# Altium PCB DRV8424.PcbDoc
Units mm, origin at the board's own origin, x right, y up, seen from the top; angles counter-clockwise.
Board outline 65 x 40 mm, 4 copper layers (Top Layer, Layer 1, Layer 2, Bottom Layer), stack 1.831 mm thick; 27 components, 26 nets, 109 pads, 66 vias.
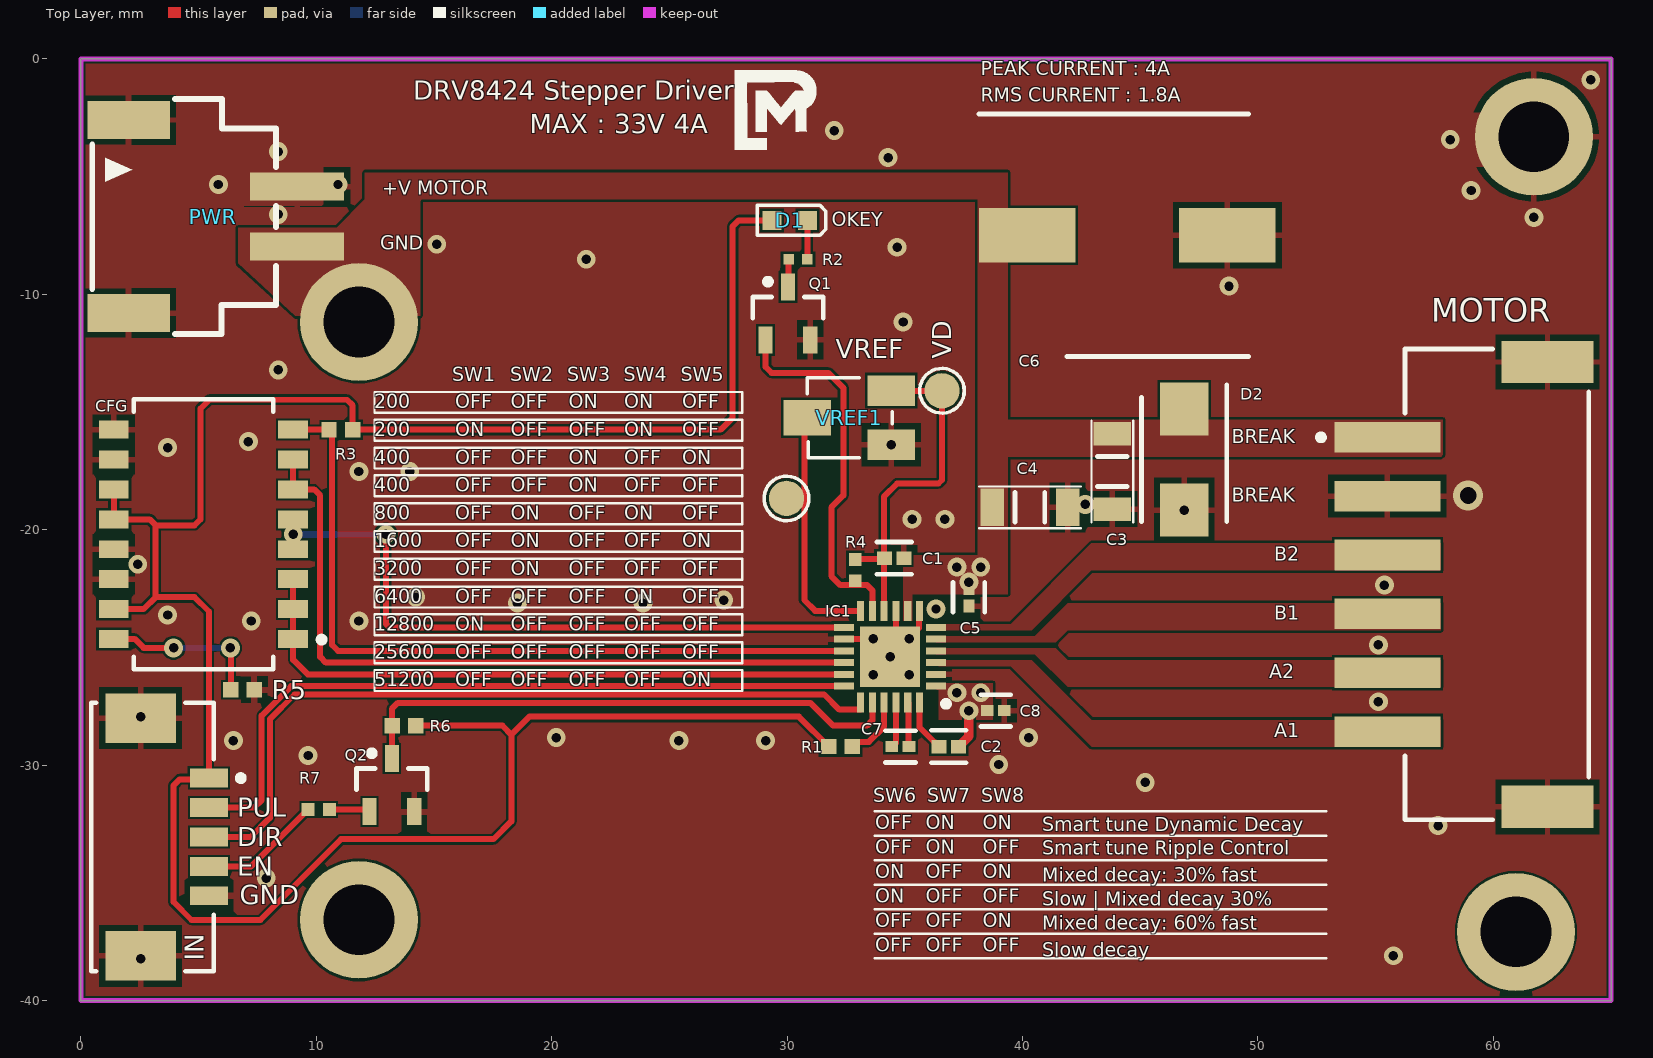
[diagram p0: Top Layer view]
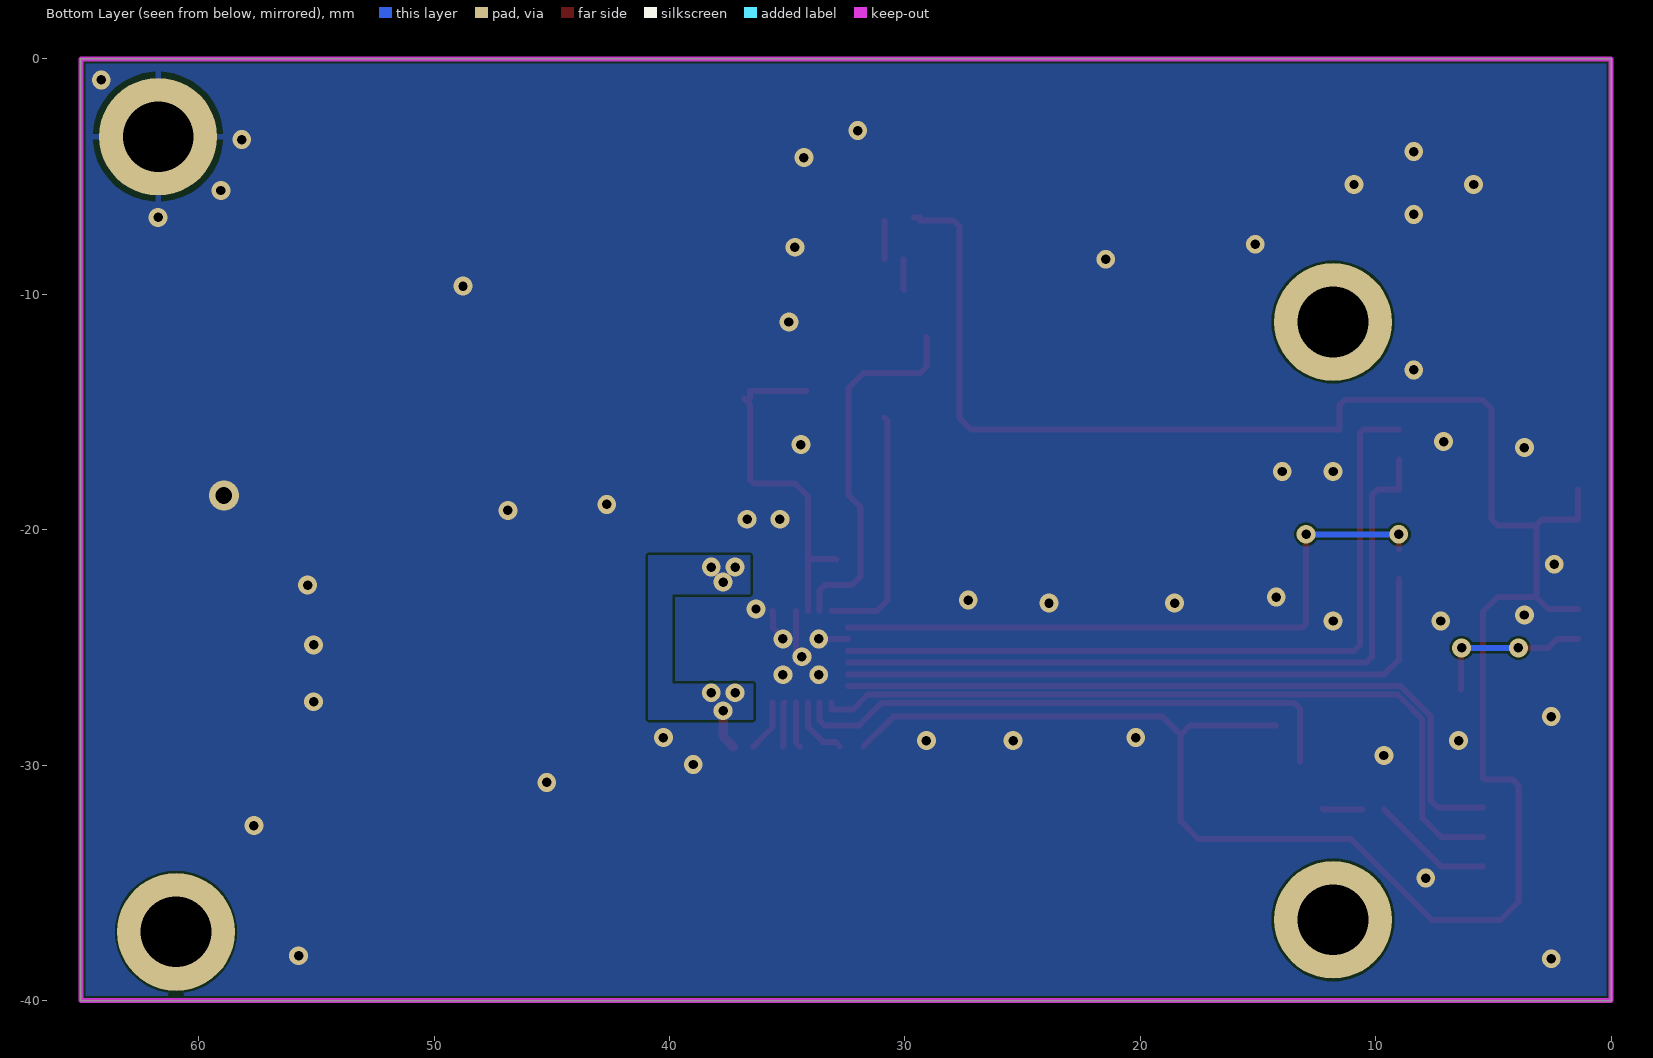
[diagram p1: Bottom Layer view, seen from below]
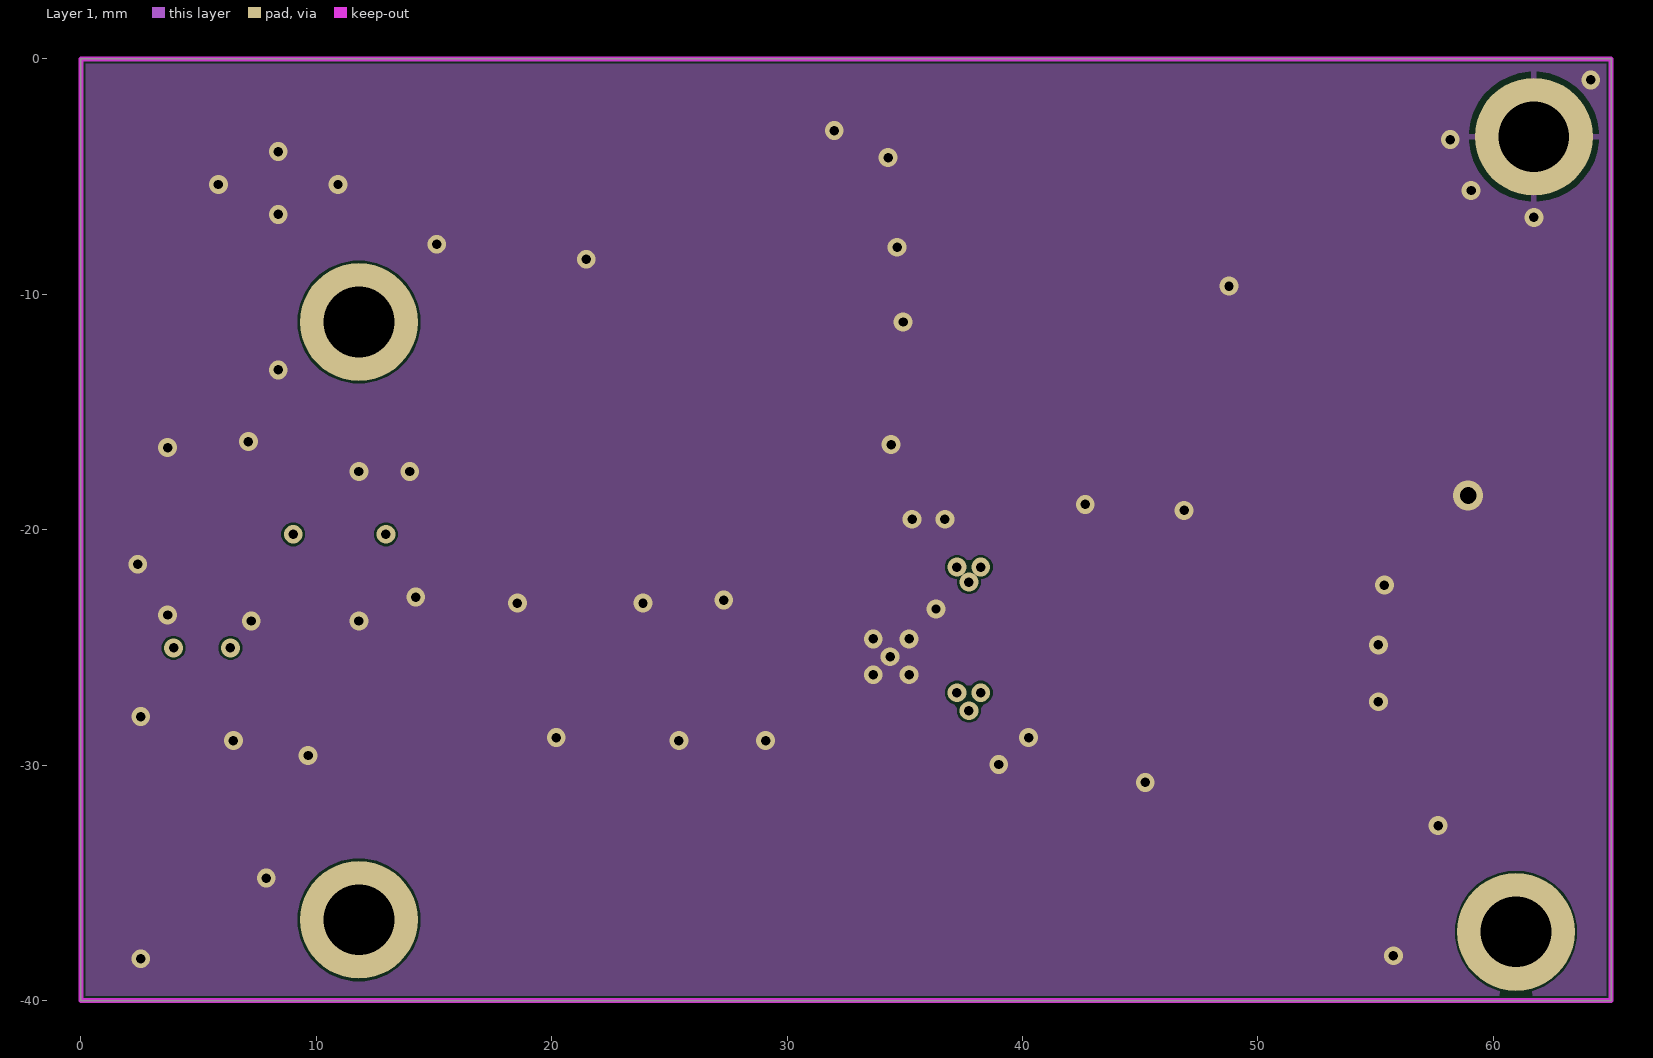
[diagram p2: Layer 1]
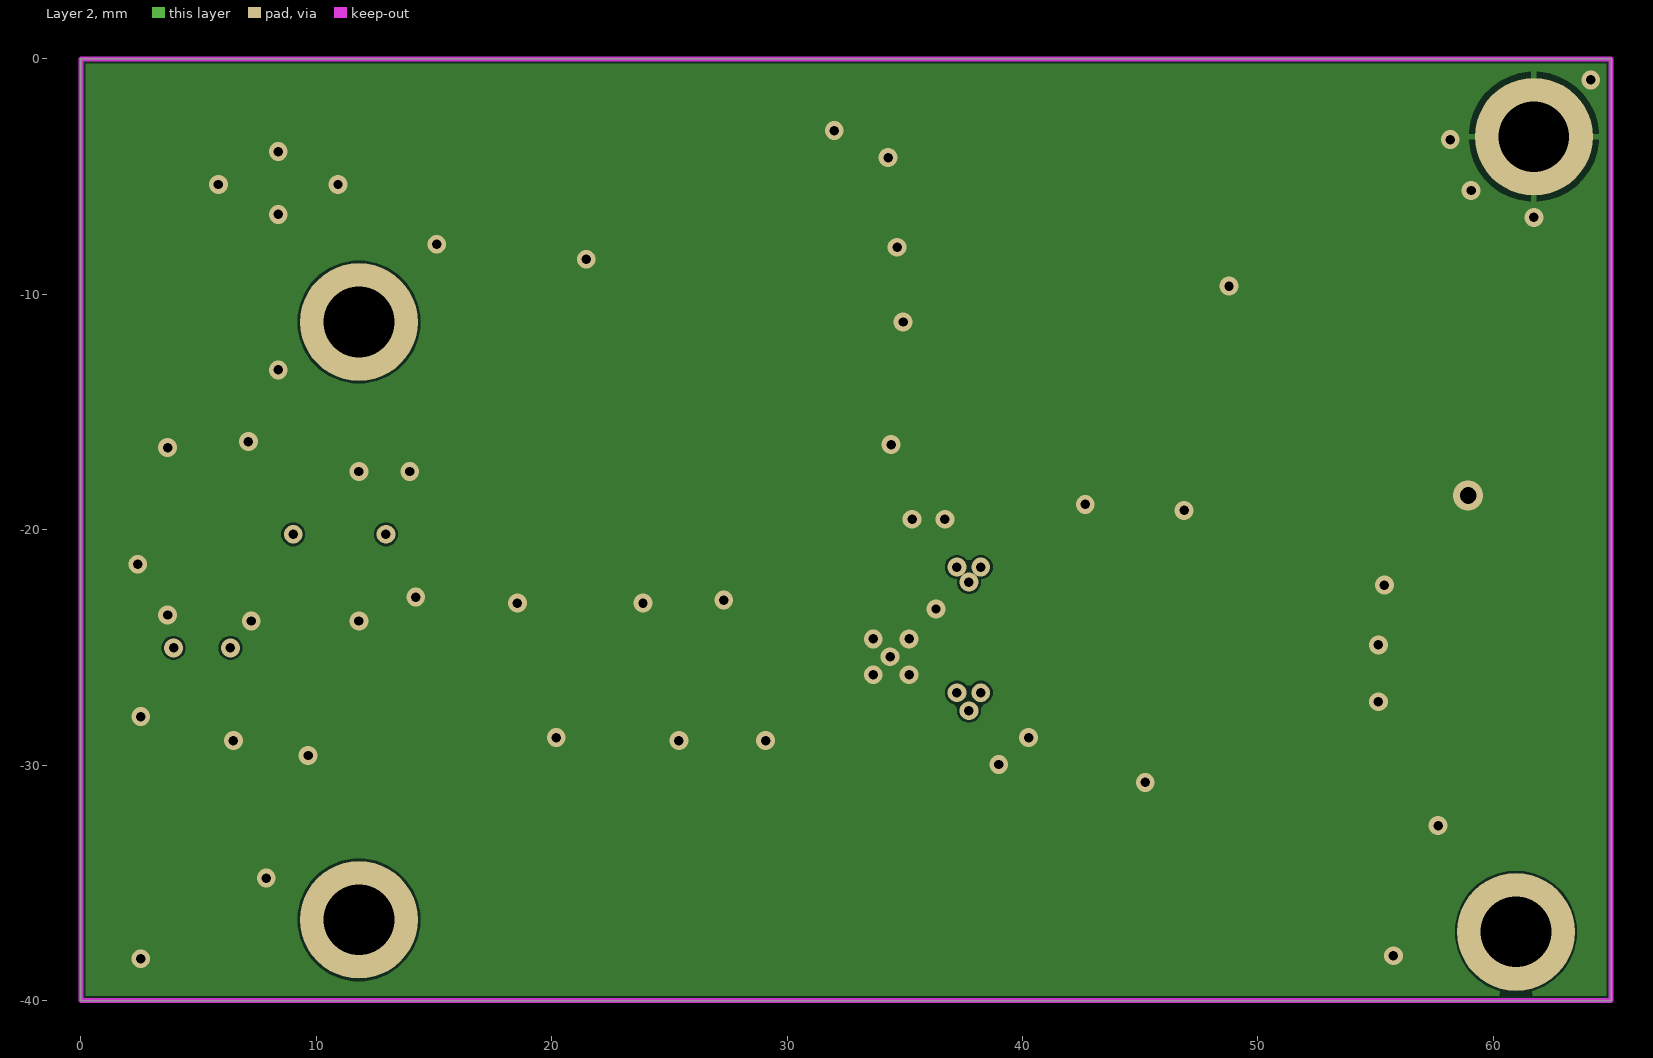
[diagram p3: Layer 2]
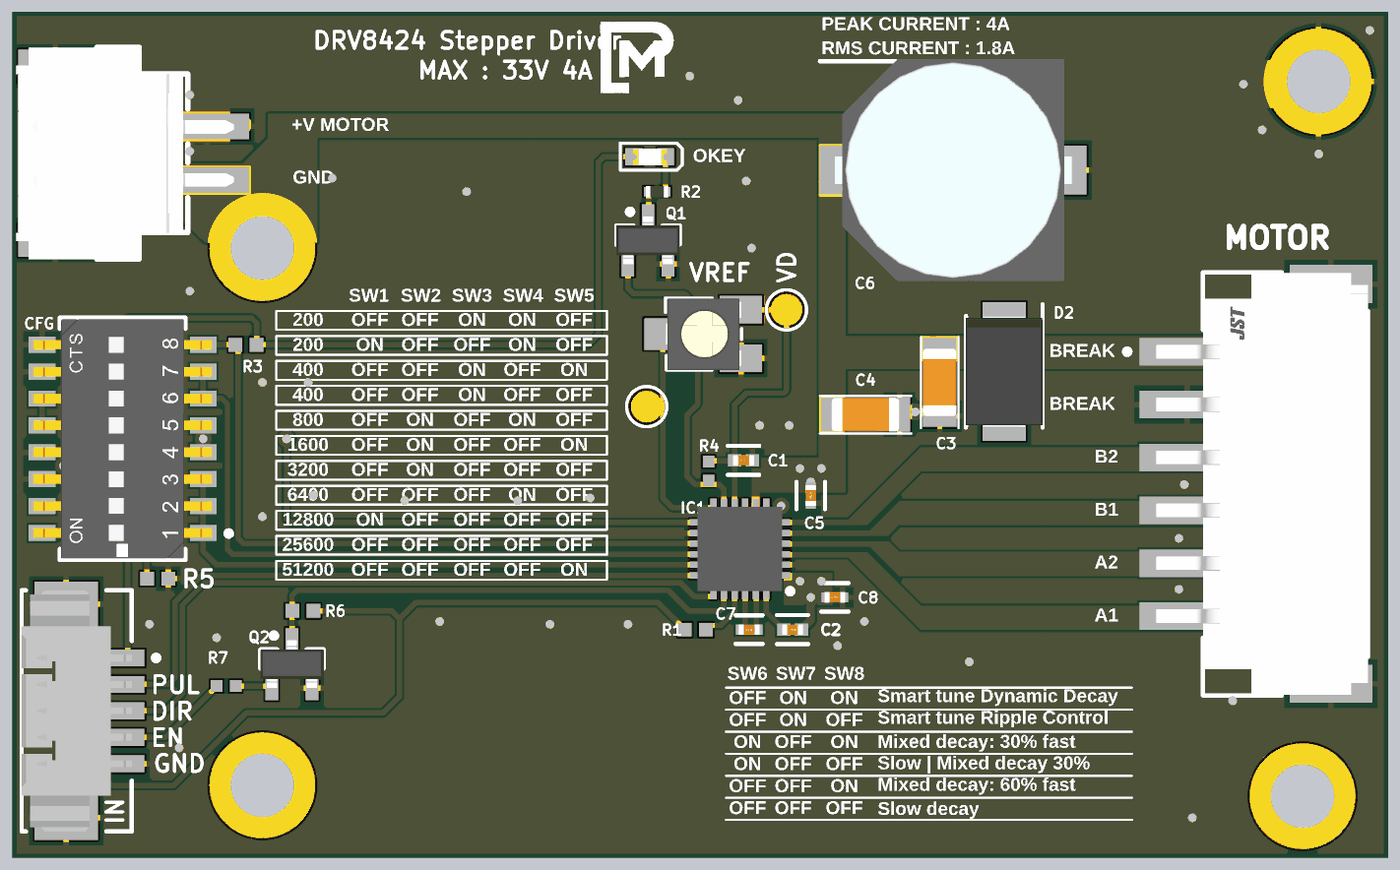
[diagram p4: 3D render of the assembled board from above, using the file's embedded part models]

## Layer stack, top to bottom
Top Solder: solder mask 0.0102, Solder Resist, Dk 3.5
Top Layer: signal copper 0.0356
Dielectric 2: prepreg 0.0711, PP-006, Dk 4.1
Layer 1: signal copper 0.009
Dielectric 1: dielectric 1.6, FR-4, Dk 4.8
Layer 2: signal copper 0.009
Dielectric 3: prepreg 0.0711, PP-006, Dk 4.1
Bottom Layer: signal copper 0.0356
Bottom Solder: solder mask 0.0102, Solder Resist, Dk 3.5

## Board outline
0,-40 0,0 65,0 65,-40

## Design rules (kind name [scope] priority, off if disabled: settings)
Clearance [All] p1: gap=0.1 ignorepadtopadclearanceinfootprint=FALSE
PolygonConnect PolygonConnect_1 [All vs IsNamedPolygon('P_BMA1') Or IsNamedPolygon('P_BMA2') Or IsNamedPolygon('P_BMB1') Or IsNamedPolygon('P_BMB2') Or IsNamedPolygon('P_GND_POWER') Or IsNamedPolygon('P_RES1') Or IsNamedPolygon('P_RES2') Or IsNamedPolygon('P_VM_TOP') Or IsNamedPolygon('P_VM_TOP_1') Or IsNamedPolygon('P_VM_BOTTOM')] p1: connectstyle=Direct reliefconductorwidth=0.254 reliefentries=4 polygonreliefangle="90 Angle" airgapwidth=0.254
PolygonConnect PolygonConnect_3 [(HasFootprint('FP-CRA2512-IPC_A') OR HasFootprint('TSQFP-48'))] p2: connectstyle=Direct reliefconductorwidth=0.254 reliefentries=4 polygonreliefangle="90 Angle" airgapwidth=0.254
PolygonConnect PolygonConnect_2 [isVia] p3: connectstyle=Direct reliefconductorwidth=0.254 reliefentries=4 polygonreliefangle="90 Angle" airgapwidth=0.254
PolygonConnect [All] p4: connectstyle=Relief reliefconductorwidth=0.254 reliefentries=4 polygonreliefangle="90 Angle" airgapwidth=0.254
RoutingVias [All] p1: holewidth=0.5 width=1 viastyle="Through Hole" minholewidth=0.4 minwidth=0.8 maxholewidth=0.5 maxwidth=1
SilkToSilkClearance [All] p1: silktosilkclearance=0.1
SolderMaskExpansion [All] p1: expansion=0.102 istentingtop=FALSE
SupplyNets "Schematic Supply Nets_3" [InNet('GND')] p1: voltage=0.000
SupplyNets "Schematic Supply Nets_2" [InNet('VM')] p2: voltage=0.000
SupplyNets "Schematic Supply Nets_1" [InNet('DVDD')] p3: voltage=0.000
SupplyNets "Schematic Supply Nets" [InNet('VCC_IO')] p4: voltage=0.000
Width [All] p1: maxlimit=2 minlimit=0.2 preferedwidth=0.3
29 further rules are at their usual default settings.

## Components (designator, comment, footprint, x,y, rotation, side; value= is the part's Value field where it differs from the comment)
C1 "C1005X5R1V474K050BC" FP-C1005-050-0_05-IPC_B 34.544,-21.209 r0 top
C2 "C1005X7R1V224K050BC" FP-C1005-050-0_05-IPC_B 36.866,-29.21 r180 top
C3 "22uF" C1206 43.815,-17.526 r270 top
C4 "22uF" C1206 40.31,-19.05 r0 top
C5 "C1005X7R1H104K050BB" FP-C1005-050-0_05-IPC_C 37.719,-22.874 r270 top
C6 "VZH221M1HTR-1010L" CAPAE1030X1050N 44.45,-7.493 r0 top value=220u
C7 "C1005X7R1H223K050BB" FP-C1005-050-0_05-IPC_C 34.812,-29.21 r180 top
C8 "C1005X7R1H104K050BB" FP-C1005-050-0_05-IPC_C 38.862,-27.686 r0 top
CFG "218-8LPST" FP-218-8LPST-MFG 5.207,-20.193 r180 top
D1 "LED" led-0603 29.361,-6.858 r0 top
D2 "SS210+" DIOM5336X244N 46.863,-17.018 r270 top
IC1 "DRV8424RGER" QFN50P400X400X100-25N-D 34.372,-25.396 r180 top
IN "53261-0571" MOLX-52361-0571-5_V 5.44,-33.05 r270 top
MOTOR "hanxia HX 2.54-6P WT" FP-S6B-XH-SM4-TB_LF_SN-MFG 60.149,-22.325 r90 top
PWR "SHOU HAN 2.54-2P WT" A2501WF-02A 4.724,-6.759 r270 top
Q1 "BC817-16LT1G" SOT-23 30.033,-10.811 r90 top
Q2 "BC817-16LT1G" SOT-23 13.208,-30.845 r90 top
R1 "ERJ-2GEJ103X" RESC1005X40X25ML05T05 32.266,-29.21 r0 top
R2 "ERJ-2GEJ221X" RESC1005X40X25LL05T05 30.461,-8.509 r180 top
R3 "ERJ-2GEJ103X" RESC1005X40X25ML05T05 11.041,-15.748 r180 top
R4 "ERJ-2GEJ152X" RESC1005X40X25NL05T05 32.893,-21.717 r270 top
R5 "ERJ-2GEJ334X" RESC1005X40X25ML05T05 6.866,-26.797 r0 top
R6 "ERJ-2GEJ103X" RESC1005X40X25ML05T05 13.724,-28.321 r180 top
R7 "ERJ-2GEJ152X" RESC1005X40X25NL05T05 10.102,-31.877 r0 top
VD "Ø1.5mm,SMD" TP_SMD_Ø1.5mm 36.576,-14.097 r0 top
VREF "Ø1.5mm,SMD" TP_SMD_Ø1.5mm 29.972,-18.669 r0 top
VREF1 "POT 20k" POT-SMD 32.639,-15.24 r90 top

## Footprints (in the part's own frame and the unit in brackets; to place one, negate y for a bottom-side part, rotate by r counter-clockwise, add the part's x,y. Pads: shape width x height; smd on the part's side, far side on the other; paste and mask are expansions set on the pad)
A2501WF-02A [mm]
  rect 1.2x4 smd: 1(-1.334,4.462) 2(1.206,4.462)
  rect 1.6x3.5 smd: 3(4.036,-2.692) 4(-4.164,-2.692)
  silkscreen extent -5.07,-4.24 4.94,3.56, body extent -5.06,-4.56 4.94,5.74, height 6.1
C1206 [mm]
  rect 1x1.6 smd: 1(1.6,0) 2(-1.6,0)
  silkscreen extent -2.16,-0.89 2.16,0.89, body extent -1.6,-0.8 1.6,0.8, height 1
CAPAE1030X1050N [mm]
  rect 4.1x2.3 smd: 1(-4.25,0) 2(4.25,0)
  silkscreen extent -6.3,-5.15 5.15,5.15, body extent -5.6,-5.25 5.6,5.25, height 10.5
DIOM5336X244N [mm]
  rect 2.25x2.05 smd: 1(-2.15,0) 2(2.15,0)
  silkscreen extent -3.18,-1.81 2.64,1.81, body extent -2.64,-1.81 2.64,1.81, height 2.44
FP-218-8LPST-MFG [mm]
  rect 1.27x0.76 smd paste+0 mask+0: 1(-3.81,4.445) 2(-3.81,3.175) 3(-3.81,1.905) 4(-3.81,0.635) 5(-3.81,-0.635) 6(-3.81,-1.905) 7(-3.81,-3.175) 8(-3.81,-4.445) 9(3.81,-4.445) 10(3.81,-3.175) 11(3.81,-1.905) 12(3.81,-0.635) 13(3.81,0.635) 14(3.81,1.905) 15(3.81,3.175) 16(3.81,4.445)
  silkscreen extent -5.14,-5.73 2.97,5.73, body extent -4.54,-5.83 4.54,5.83, height 0.25
FP-C1005-050-0_05-IPC_B [mm]
  rect 0.639x0.572 smd paste+0 mask+0: 1(-0.417,0) 2(0.417,0)
  silkscreen extent -0.74,-0.69 0.74,0.69, body extent -0.89,-0.44 0.89,0.44, height 0.25
FP-C1005-050-0_05-IPC_C [mm]
  rect 0.539x0.472 smd paste+0 mask+0: 1(-0.367,0) 2(0.367,0)
  silkscreen extent -0.64,-0.67 0.64,0.67, body extent -0.74,-0.38 0.74,0.38, height 0.25
FP-S6B-XH-SM4-TB_LF_SN-MFG [mm]
  rect 1.3x4.5 smd paste+0 mask+0: 1(6.25,4.65) 2(3.75,4.65) 3(1.25,4.65) 4(-1.25,4.65) 5(-3.75,4.65) 6(-6.25,4.65)
  rect 1.8x3.9 smd paste+0 mask+0: 7(-9.45,-2.15) 8(9.45,-2.15)
  silkscreen extent -10,-3.9 10,7.6, body extent -10.45,-4.2 10.45,7, height 0.25
led-0603 [mm]
  rect 0.8x0.8 smd: 1(0,0) 2(1.5,0)
  silkscreen extent -0.64,-0.64 2.29,0.64, body extent -0.04,-0.41 1.56,0.38, height 0.7
MOLX-52361-0571-5_V [mm] "SMD, 5-Leads, Body 11.4x5.2mm, Pitch 1.25mm"
  rect 0.8x1.6 smd: 1(-2.5,0) 2(-1.25,0) 3(0,0) 4(1.25,0) 5(2.5,0)
  rect 2.1x3 smd: MP1(-5.05,-2.9) MP2(5.05,-2.9)
  silkscreen extent -5.7,-5 5.7,1.48, body extent -5.7,-5 5.7,0.2, height 3.4
POT-SMD [mm]
  rect 1.3x2 smd: 1(-1.15,-1.784) 2(1.15,-1.784)
  rect 1.5x2 smd: 3(0,1.784)
  silkscreen extent -1.7,-1.82 1.7,1.78, body extent -1.7,-1.82 1.7,1.78, height 2
QFN50P400X400X100-25N-D [mm]
  rect 0.85x0.3 smd: 1(-1.95,1.25) 2(-1.95,0.75) 3(-1.95,0.25) 4(-1.95,-0.25) 5(-1.95,-0.75) 6(-1.95,-1.25) 13(1.95,-1.25) 14(1.95,-0.75) 15(1.95,-0.25) 16(1.95,0.25) 17(1.95,0.75) 18(1.95,1.25)
  rect 0.3x0.85 smd: 7(-1.25,-1.95) 8(-0.75,-1.95) 9(-0.25,-1.95) 10(0.25,-1.95) 11(0.75,-1.95) 12(1.25,-1.95) 19(1.25,1.95) 20(0.75,1.95) 21(0.25,1.95) 22(-0.25,1.95) 23(-0.75,1.95) 24(-1.25,1.95)
  rect 2.55x2.55 smd: 25(0,0)
  silkscreen extent -2.5,1.88 -2.25,2.12, body extent -2,-2 2,2, height 1
RESC1005X40X25LL05T05 [mm] "Chip Resistor, 2-Leads, Body 1.05x0.55mm, IPC High Density"
  rect 0.45x0.45 smd: 1(-0.4,0) 2(0.4,0)
  body extent -0.53,-0.28 0.53,0.28, height 0.4
RESC1005X40X25ML05T05 [mm] "Chip Resistor, 2-Leads, Body 1.00x0.50mm, IPC Low Density"
  rect 0.65x0.65 smd: 1(-0.5,0) 2(0.5,0)
  body extent -0.53,-0.27 0.53,0.28, height 0.4
RESC1005X40X25NL05T05 [mm] "Chip Resistor, 2-Leads, Body 1.00x0.50mm, IPC Medium Density"
  rect 0.55x0.55 smd: 1(-0.45,0) 2(0.45,0)
  body extent -0.53,-0.27 0.53,0.28, height 0.4
SOT-23 [mm]
  rect 1.15x0.6 smd: 1(-1.125,0.95) 2(-1.125,-0.95) 3(1.125,0)
  silkscreen extent -0.2,-1.5 1.47,1.5, body extent -1.13,-1.5 1.13,1.5, height 1.2
TP_SMD_Ø1.5mm [mm]
  round 1.5 smd paste-5: 1(0,0)
  silkscreen extent -0.95,-0.95 0.95,0.95

## Part data
C1: library part CMP-08246-003870-1, "Multilayer Ceramic Capacitors 470nF ±10% 35V X5R SMD 0402", Capacitance=470nF, Case Code (Imperial)=0402, Case Code (Metric)=1005, Dielectric=X5R, Dielectric Material=Ceramic, Max Operating Temperature=85°C, Min Operating Temperature=-55°C, Package Quantity=10000, Tolerance=10%, Voltage Rating=35V, Case/Package=0402, Height=0.5mm, Lead Free="Lead Free", Length=0.039inch, Mount="Surface Mount", Packaging="Tape and Reel", RoHS Compliant=Yes, Series=C, Termination=SMD/SMT, Thickness=0.022inch, Voltage Rating (DC)=35V, Weight=2.3E-05oz, Width=0.02inch
C2: library part CMP-08246-006551-1, "Multilayer Ceramic Capacitors 220nF ±10% 35V X7R SMD 0402", Capacitance=220nF, Case Code (Imperial)=0402, Case Code (Metric)=1005, Dielectric=X7R, Dielectric Material=Ceramic, Max Operating Temperature=125°C, Min Operating Temperature=-55°C, Package Quantity=10000, Tolerance=10%, Voltage Rating=35V, Case/Package=0402, Height=0.5mm, Lead Free="Lead Free", Length=0.039inch, Mount="Surface Mount", Packaging="Tape and Reel", RoHS Compliant=Yes, Termination=SMD/SMT, Thickness=0.022inch, Voltage Rating (DC)=35V, Weight=2.3E-05oz, Width=0.02inch
C3 C4: library part Cap, "Capacitor", Designer="Parsa Malekpour"
C5 C8: library part CMP-2000-05393-2, "Multilayer Ceramic Capacitors 100nF ±10% 50V X7R SMD 0402", Capacitance=100nF, Case Code (Imperial)=0402, Case Code (Metric)=1005, Dielectric=X7R, Dielectric Material=Ceramic, Max Operating Temperature=125°C, Min Operating Temperature=-55°C, Package Quantity=1, Tolerance=10%, Voltage=50V, Case/Package=0402, Construction=Flat, Depth=0.5mm, Height=0.5mm, Lead Free="Lead Free", Length=1mm, Mount="Surface Mount", Packaging="Tape and Reel", Radiation Hardening=No, REACH SVHC="No SVHC", Resistor Type=Ceramic, RoHS Compliant=Yes, Series=C, Termination=SMD/SMT, Thickness=0.022inch, Voltage Rating=50V, Voltage Rating (DC)=50V, Weight=2.3E-05oz, Width=0.02inch
C6: "Capacitor Polarised", Manufacturer_Name=Lelon, Datasheet Link=https://www.mouser.co.uk/datasheet/2/231/151002387394-1222329.pdf, Height=10.5mm, Manufacturer_Part_Number=VZH221M1HTR-1010L
C7: library part CMP-08246-004483-1, "Multilayer Ceramic Capacitors 22nF ±10% 50V X7R SMD 0402", Capacitance=22nF, Case Code (Imperial)=0402, Case Code (Metric)=1005, Dielectric=X7R, Dielectric Material=Ceramic, Max Operating Temperature=125°C, Min Operating Temperature=-55°C, Package Quantity=1, Tolerance=10%, Voltage Rating=50V, Case/Package=0402, Construction=Flat, Depth=0.5mm, Height=0.5mm, Lead Free="Lead Free", Length=1mm, Mount="Surface Mount", Number of Pins=2, Packaging="Tape and Reel", Radiation Hardening=No, REACH SVHC="No SVHC", Resistor Type=Ceramic, RoHS Compliant=Yes, Series=C, Termination=SMD/SMT, Thickness=0.022inch, Voltage Rating (DC)=50V, Weight=2.3E-05oz, Width=0.02inch
CFG: library part CMP-07018-000007-1, "SWITCH SLIDE DIP SPST 25MA 24V", Contact Resistance=100mR, Current Rating=25mA, Max Operating Temperature=85°C, Max Voltage Rating (DC)=24V, Min Operating Temperature=-55°C, Package Quantity=40, Actuator Type="Slide (Standard)", Contact Material=Copper, Contact Plating=Gold, Depth=8.44mm, Electrical Life=1000Cycles, Height=2.65mm, Lead Free="Lead Free", Length=0.446inch, Max Current Rating=25mA, Mount="Surface Mount", Number of Positions=8, Orientation=Straight, Packaging=Rail/Tube, Pitch=0.05inch, Radiation Hardening=No, RoHS Compliant=Yes, Series=218, Terminal Pitch=1.27mm, Termination="Gull Wing", Throw Configuration=SPST, Voltage Rating (DC)=24V, Washable=Yes
D2: "Schottky Diode", Manufacturer_Name="Multicomp Pro", Datasheet Link=http://www.farnell.com/datasheets/2581106.pdf?_ga=2.200928429.2067214691.1552389282-167411096.1502103357, Height=2.44mm, Manufacturer_Part_Number=SS210+
IC1: "Integrated Circuit", Manufacturer_Name="Texas Instruments", Mouser Part Number=595-DRV8424RGER, Arrow Part Number=DRV8424RGER, Arrow Price/Stock=null?region=nac, Datasheet Link=https://www.ti.com/lit/ds/symlink/drv8424e.pdf?ts=1606468050255, Height=1mm, Manufacturer_Part_Number=DRV8424RGER, Mouser Price/Stock=https://www.mouser.co.uk/ProductDetail/Texas-Instruments/DRV8424RGER?qs=zW32dvEIR3vjkIn0AjQrCA%3D%3D
IN: library part CMP-2000-05249-1, "Male Header, Pitch 1.25 mm, 1 x 5 Position, Height 3.4 mm, RoHS, Tape and Reel", Current Rating=1A, Manufacturer=Molex, Voltage Rating=125V, Brand=Molex, Contact Material=PhosphorBronze, Contact Plating=Tin, Datasheet URL=http://datasheet.octopart.com/532610571-Molex-datasheet-8343080.pdf, Datasheet Version="Rev. D, 04/2004", Factory Pack Quantity=1000, Housing Material=Thermoplastic, Manufacturer URL=http://www.molex.com/, Mounting Angle=Right, Mounting Style=SMD/SMT, Number of Positions=5, Number of Positions / Contacts=5, Number of Rows=1, Packaging=Reel, Pitch=1.25mm, Product Category=Headers&WireHousings, Product Type=Headers, RoHS=Details, Series=53261, Termination Style=SMD, Tradename=PicoBlade, Type=Shrouded
MOTOR: library part CMP-17439-000164-1, "CONN HEADER SMD R/A 6POS 2.5MM - S6B-XH-SM4-TB(LF)(SN)", Color=Natural, Contact Resistance=20mR, Flammability Rating="UL94 V-0", Housing Color=Beige, Max Current Rating=3A, Max Operating Temperature=85°C, Max Voltage Rating (AC)=250V, Min Operating Temperature=-25°C, Package Quantity=1, Connector Type=Header, Contact Finish - Mating=TIN, Contact Material="Copper Alloy", Contact Plating=Copper, Contact Shape=Square, Contact Type="Male Pin", Depth=7mm, Fastening Type=Detent, Gender=Male, Housing Material=Polyamide, Insulation Color=Natural, Insulation Material=Nylon, Lead Free="Lead Free", Length=20mm, Mount="Surface Mount", Number of Contacts=6, Number of Positions=6, Number of Rows=1, Orientation="Right Angle", Packaging="Tape and Reel", Pitch=2.5mm, REACH SVHC="No SVHC", Series=XH, Termination=Solder, Voltage Rating=250V
PWR: library part 1778764, "Connector", Manufacturer_Name="Phoenix Contact", Mouser Part Number=651-1778764, Arrow Part Number=1778764, Arrow Price/Stock=https://www.arrow.com/en/products/1778764/phoenix-contact?utm_currency=USD&region=nac, Datasheet Link=http://www.phoenixcontact.com/de/produkte/1778764/pdf, Height=5.1mm, Manufacturer_Part_Number=1778764, Mouser Price/Stock=https://www.mouser.co.uk/ProductDetail/Phoenix-Contact/1778764?qs=i0qWf6NAoDsxsSJGIXIgDA%3D%3D
Q1 Q2: library part CMP-1048-00736-1, "General Purpose Transistor, NPN Silicon, 3-Pin SOT-23, Pb-Free, Tape and Reel", Manufacturer="On Semiconductor", ComponentLink1Description="Manufacturer URL", ComponentLink1URL=http://www.onsemi.com/, ComponentLink2Description=Datasheet, ComponentLink2URL=http://www.onsemi.com/pub_link/Collateral/BC817-16LT1-D.PDF, ComponentLink3Description="Package Specification", ComponentLink3URL=http://www.onsemi.cn/pub_link/Collateral/318-08.PDF, DatasheetVersion="Rev. 12", fT Min (MHz)=100, IC Continuous (A)=0.5, Mounting Technology="Surface Mount", PackageDescription="3-Pin Small Outline Transistor, Body 2.92 x 1.3 mm, Pitch 0.95 mm", PackageReference=SOT-23-3-318-08, PackageVersion="Rev. AP, 11/2009", Packing="Tape and Reel", PartNumber=BC817-16LT1G, Polarity=NPN, RoHS=TRUE
R1 R3 R6: library part CMP-2002-00433-1, Manufacturer=Panasonic, Resistance=10K, Part Number=ERJ-2GEJ103X
R2: library part CMP-2002-00487-3, "Chip Resistor, 220 Ohm, +/- 5%, 100 mW, -55 to 155 degC, 0402 (1005 Metric), RoHS, Tape and Reel", Case Code (Imperial)=0402, Case Code (Metric)=1005, Manufacturer="Basic Passives", Max Operating Temperature="155 degC", Min Operating Temperature="-55 degC", Package Quantity=10000, Power Rating="100 mW", Resistance="220 Ohm", Tolerance=5%, Voltage Rating="50 V", Case\/Package=0402, ComponentLink1Description="Manufacturer URL", ComponentLink1URL=http://www.panasonic.com/, ComponentLink2Description=Datasheet, ComponentLink2URL=http://industrial.panasonic.com/cdbs/www-data/pdf/RDA0000/AOA0000C84.pdf, DatasheetVersion=04/2015, Height="0.35 mm", Length="1 mm", Mount="Surface Mount", Mounting Technology="Surface Mount", PackageDescription="2-Pin Surface Mount Device, Body 1 x 0.5 mm", PackageReference=0402, Packaging="Tape and Reel", PartNumber=ERJ-2GEJ221X, Pins=2, Radiation Hardening=No, REACH SVHC=Unknown, RoHSCompliant=true, Width="0.5 mm"
R4 R7: library part CMP-1011-00078-2, Manufacturer=Panasonic, Resistance=1.5K, Part Number=ERJ-2GEJ152X
R5: library part CMP-1011-00134-2, Manufacturer=Panasonic, Part Number=ERJ-2GEJ334X
VD VREF: library part TP_SMD_Ø1.5MM, "1.5mm circular SMD testpad", Manufacturer="Nordic Semiconductor", Manufacturer Part Number=N.A., Artikkelnr Noca=N.A., Component Class=Connectors, ComponentLink1Description=Datasheet, ComponentLink1URL=N.A., ComponentLink2Description="Supplier link", ComponentLink2URL=N.A., Footprint Doc=TP_SMD_Ø1.5mm, HelpURL=N.A., LatestRevisionDate=2016-06-02, Note=N.A., Pad Count=1, Part Number=TP_SMD_Ø1.5MM, Part number IPS=N.A., PartId=100500477, Published=2016-06-02, Supplier 1=N.A., Supplier 2=N.A., Supplier Part Number 1=N.A., Supplier Part Number 2=N.A.
VREF1: library part R-POT, "Varible Resistor", Resistance=10K

## Free pads (board coordinates)
  round 5 hole 3: 5(11.811,-36.57) 5(11.811,-11.176) 5(60.96,-37.084) 5(61.722,-3.302)

## Via types
v1: diameter 0.8, hole 0.4, Top Layer to Bottom Layer, tented both sides, 65 vias
v2: diameter 1.27, hole 0.711, Top Layer to Bottom Layer, 1 vias

## Nets (pads, with @x,y where several pads share a name; then routed paths per layer and width w, separated by ;. In a path a pad name is that pad's centre, name@x,y a point inside that pad or via, vN(x,y) a via of type N, cw(c..) or ccw(c..) an arc to the next point about the centre after c; other vN are vias at no path point)
BMA1: IC1.3 MOTOR.6
BMA2: IC1.4 MOTOR.5
BMB1: IC1.5 MOTOR.4
BMB2: IC1.6 MOTOR.3
DECAY0: CFG.6 CFG.7 IC1.16 | length 31.7
  Top Layer w0.254: CFG.7 CFG.6 9.906,-18.288 10.16,-18.542 10.16,-25.4 10.406,-25.646 IC1.16
DECAY1: CFG.8 IC1.15 R3.2 | length 32.6
  Top Layer w0.254: CFG.8 R3.2 10.668,-15.875 10.668,-24.892 10.922,-25.146 IC1.15
DIR: IC1.19 IN.3 | length 33.2
  Top Layer w0.254: IN.3 7.216,-33.05 8.028,-32.238 8.028,-28.047 9.075,-27 31.572,-27 32.216,-27.644 33.122,-27.644 IC1.19
DVDD: C1.1 IC1.10 R4.1 VD.1 VREF1.2 | length 15.2
  Top Layer w0.254: R4.1 32.922,-21.238 33.303,-21.238 34.098,-21.238 C1.1@34.122,-21.214 ; IC1.10 C1.1@34.122,-21.214 ; C1.1@34.122,-21.209 34.122,-18.583 34.671,-18.034 36.427,-18.034 36.576,-17.885 36.576,-14.673 36.814,-14.434 VD.1@36.83,-14.434 ; C1.1 C1.1@34.122,-21.214 ; VREF1.2@34.176,-14.097 VD.1 VD.1@36.576,-14.434
EN: IC1.20 Q2.3 R6.2 | length 24
  Top Layer w0.254: Q2.3@13.208,-29.845 13.208,-27.608 13.462,-27.354 30.988,-27.354 31.955,-28.321 33.401,-28.321 33.622,-28.1 IC1.20
FLT: IC1.11 Q1.1 R4.2 | length 16
  Top Layer w0.254: Q1.1@29.083,-11.811 29.083,-13.081 29.337,-13.335 31.75,-13.335 32.385,-13.97 32.385,-18.542 31.877,-19.05 31.877,-21.971 32.258,-22.352 33.401,-22.352 33.622,-22.573 IC1.11
GND: C1.2 C3.1 C4.1 C5.2 C6.2 C8.2 CFG.9 CFG.10 CFG.13 CFG.14 D2.2 IC1.2 IC1.7 IC1.9 IC1.14 IC1.25 IN.5 IN.MP1 IN.MP2 MOTOR.2 MOTOR.7 MOTOR.8 pad.5@61.722,-3.302 PWR.1 PWR.3 PWR.4 Q1.2 Q2.2 R5.2 VREF1.1 | length 4.7
  Top Layer w0.254: IC1.14 33.647,-24.646 v1(33.655,-24.638) ; v1(34.372,-25.396) 34.622,-25.146 IC1.9 ; v1(35.179,-24.638) 35.179,-24.589 35.599,-24.169 35.599,-23.469 IC1.7
  other v1: 2.54,-38.227 55.753,-38.1 7.874,-34.798 57.652,-32.569 45.212,-30.734 38.989,-29.972 9.652,-29.591 6.477,-28.956 25.4,-28.956 29.083,-28.956 20.193,-28.829 40.259,-28.829 2.54,-27.94 55.118,-27.305 33.655,-26.162 35.179,-26.162 55.118,-24.892 7.239,-23.876 11.811,-23.876 3.683,-23.622 36.322,-23.368 18.542,-23.114 23.876,-23.114 27.305,-22.987 14.224,-22.86 55.372,-22.352 2.413,-21.463 35.306,-19.558 36.703,-19.558 46.863,-19.177 42.664,-18.923 11.811,-17.526 13.97,-17.526 3.683,-16.51 34.417,-16.383 7.112,-16.256 8.382,-13.208 34.925,-11.176 48.768,-9.652 21.463,-8.509 34.671,-8.001 15.113,-7.874 61.722,-6.731 8.382,-6.604 59.055,-5.588 5.842,-5.334 10.922,-5.334 34.29,-4.191 8.382,-3.937 58.166,-3.429 32.004,-3.048 64.135,-0.889
  other v2: 58.928,-18.542
M0: CFG.4 CFG.5 IC1.13 | length 27.9
  Top Layer w0.254: CFG.4 v1(9.017,-20.193) ; v1(12.954,-20.193) 12.954,-23.997 13.103,-24.146 IC1.13
  Bottom Layer w0.254: v1(9.017,-20.193) v1(12.954,-20.193)
M1: CFG.1 CFG.2 CFG.3 IC1.17 | length 27.1
  Top Layer w0.254: CFG.3 CFG.2 CFG.1 9.017,-25.527 9.636,-26.146 IC1.17
NetC2_2: C2.2 IC1.24 | length 2.2
  Top Layer w0.254: IC1.24 35.622,-28.383 36.256,-29.017 36.256,-29.051 36.416,-29.21 C2.2
NetC7_1: C7.1 IC1.23 | length 1.9
  Top Layer w0.254: IC1.23 35.145,-27.369 35.145,-29.176 C7.1
NetC7_2: C7.2 IC1.22 | length 2
  Top Layer w0.254: C7.2 34.479,-29.21 34.622,-29.067 IC1.22
NetCFG_16: CFG.16 R5.1 | length 6.9
  Top Layer w0.254: CFG.16 2.286,-24.638 2.667,-25.019 v1(3.937,-25.019) ; v1(6.35,-25.019) 6.366,-25.035 R5.1
  Bottom Layer w0.254: v1(3.937,-25.019) v1(6.35,-25.019)
NetD1_2: D1.2 R2.1 | length 1.7
  Top Layer w0.254: R2.1 D1.2
NetIC1_21: IC1.21 R1.2 | length 2.7
  Top Layer w0.254: R1.2 32.964,-29.012 33.472,-29.012 34.122,-28.362 IC1.21
NetIN_4: IN.4 R7.1 | length 5.2
  Top Layer w0.254: IN.4 7.229,-34.3 R7.1
NetQ1_3: Q1.3 R2.2 | length 1.3
  Top Layer w0.254: Q1.3@30.033,-9.811 30.061,-9.783 R2.2
NetQ2_1: Q2.1 R7.2 | length 1.7
  Top Layer w0.254: R7.2 12.226,-31.877 Q2.1@12.258,-31.845
STP: IC1.18 IN.2 | length 31.2
  Top Layer w0.254: IN.2 7.37,-31.8 7.674,-31.496 7.674,-27.901 8.929,-26.646 IC1.18
VCC_IO: CFG.11 CFG.12 CFG.15 D1.1 IN.1 R1.1 R3.1 R6.1 | length 104
  Top Layer w0.254: CFG.15 2.667,-23.368 3.175,-22.86 ; CFG.11 CFG.12 2.921,-19.558 3.175,-19.812 ; R6.1 17.907,-28.321 18.288,-28.702 ; D1.1@29.345,-6.842 D1.1 27.94,-6.858 27.686,-7.112 27.686,-15.24 27.178,-15.748 R3.1 11.541,-14.716 11.303,-14.478 5.461,-14.478 5.08,-14.859 5.08,-19.558 4.826,-19.812 3.175,-19.812 ; D1.1@29.361,-6.731 D1.1@29.615,-6.731 ; 30.48,-27.94 19.05,-27.94 18.288,-28.702 ; 30.496,-27.94 R1.1 ; 3.175,-22.86 4.826,-22.86 5.44,-23.474 IN.1 5.383,-30.607 4.191,-30.607 3.937,-30.861 3.937,-35.814 4.699,-36.576 7.62,-36.576 11.049,-33.147 17.526,-33.147 18.288,-32.385 18.288,-28.702 ; 3.175,-22.86 3.175,-19.812
VDREF1: IC1.12 VREF1.3 VREF.1 | length 10.4
  Top Layer w0.254: VREF1.3 30.734,-15.361 30.734,-18.796 30.734,-22.987 31.193,-23.446 IC1.12
VM: C2.1 C3.2 C4.2 C5.1 C6.1 C8.1 D2.1 IC1.1 IC1.8 MOTOR.1 pad.5@11.811,-11.176 PWR.2 | length 1.7
  Top Layer w0.4: C2.1 37.316,-29.21 37.402,-29.124 37.402,-29.09 37.719,-28.773 v1(37.719,-27.686)
  other v1: 37.211,-26.924 38.227,-26.924 37.719,-22.225 37.211,-21.59 38.227,-21.59

## Polygon pours and split planes (outlines as drawn)
GND on Top Layer "P_GNS_TOP" (solid, remove dead copper, pour order 64): 0,0 65.024,0 65.024,-40.005 0,-40.005
VM on Top Layer "P_VM_TOP" (solid, remove dead copper, pour order 60): 39.37,-15.325 39.666,-15.325 57.849,-15.325 57.849,-16.825 57.783,-16.891 39.624,-16.891 39.37,-16.891 39.37,-22.733 35.306,-22.733 35.306,-23.876 34.925,-23.876 34.925,-21.082 38.1,-21.082 38.1,-5.969 14.478,-5.969 14.411,-6.036 14.411,-10.92 9.106,-10.92 6.682,-8.682 6.682,-7.174 10.86,-7.174 12.065,-5.969 12.065,-4.826 39.37,-4.826
GND on Top Layer "P_GND_POWER" (solid, remove dead copper, pour order 61): 10.287,-4.572 10.287,-6.177 10.236,-6.228 6.528,-6.228 6.528,-4.623 6.477,-4.572 6.477,-2.286 63.246,-2.286 63.246,-4.572
BMB2 on Top Layer "P_BMA2" (solid, remove dead copper, pour order 56): 42.926,-21.725 40.386,-24.265 36.449,-24.265 36.449,-24.011 39.497,-24.011 42.926,-20.582 57.769,-20.582 57.769,-21.725
BMA1 on Top Layer "P_BMA2" (solid, remove dead copper, pour order 58): 42.934,-28.083 40.394,-25.543 36.449,-25.543 36.449,-25.797 39.505,-25.797 42.934,-29.226 57.769,-29.226 57.769,-28.083
BMB1 on Top Layer "P_BMA2" (solid, remove dead copper, pour order 46): 41.91,-24.265 41.402,-24.773 36.322,-24.773 36.322,-24.519 40.513,-24.519 41.91,-23.122 57.769,-23.122 57.769,-24.265
BMA2 on Top Layer "P_BMA2" (solid, remove dead copper, pour order 50): 41.91,-25.535 41.402,-25.027 36.322,-25.027 36.322,-25.281 40.513,-25.281 41.91,-26.678 57.769,-26.678 57.769,-25.535
VM on Top Layer "P_VM_TOP" (solid, remove dead copper, pour order 45): 38.735,-28.067 36.449,-28.067 36.449,-26.797 36.346,-26.797 36.322,-26.773 36.322,-26.519 38.735,-26.519
GND on Bottom Layer "P_GND_BOTTOM" (solid, remove dead copper, pour order 63): 65.024,0 65.024,-40.005 0,-40.005 0,0
VM on Bottom Layer "NONET_L-01_P-001" (solid, remove dead copper, pour order 57): 36.576,-21.082 36.576,-22.733 39.878,-22.733 39.878,-26.543 36.449,-26.543 36.449,-28.067 40.894,-28.067 40.894,-21.082
GND on Layer 1 "GND_L02_P065" (solid, pour order 65): 0,0 0,-40.005 64.897,-40.005 64.897,0
GND on Layer 2 "GND_L03_P066" (solid, pour order 66): 0,0 65.024,0 65.024,-40.005 0,-40.005

## Keep-outs
Keep-Out Layer:
  the board outline again, w0.2

## Silkscreen, mask and mechanical layers (free items; w line width, h text height)
Top Overlay:
  drawing of 52 lines, arcs and shapes, not listed
  text "PEAK CURRENT : 4A" at 38.227,-0.877 h1
  text "DRV8424 Stepper Driver" at 14.12,-1.742 h0.8
  text "RMS CURRENT : 1.8A" at 38.227,-2.02 h1
  text "MAX : 33V 4A" at 19.073,-3.152 h0.8
  text "+V MOTOR" at 12.805,-5.971 h1
  text "OKEY" at 31.901,-7.29 h1
  text "GND" at 12.724,-8.306 h1
  text "SW1" at 15.778,-13.894 h1
  text "SW2" at 18.237,-13.894 h1
  text "SW3" at 20.65,-13.894 h1
  text "SW4" at 23.063,-13.894 h1
  text "SW5" at 25.476,-13.894 h1
  text "200" at 12.47,-15.037 h1
  text "OFF" at 15.891,-15.037 h1
  text "OFF" at 18.258,-15.037 h1
  text "ON" at 20.717,-15.037 h1
  text "ON" at 23.084,-15.037 h1
  text "OFF" at 25.543,-15.037 h1
  text "200" at 12.47,-16.218 h1
  text "ON" at 15.891,-16.218 h1
  text "OFF" at 18.258,-16.218 h1
  text "OFF" at 20.717,-16.218 h1
  text "ON" at 23.084,-16.218 h1
  text "OFF" at 25.543,-16.218 h1
  text "BREAK" at 48.891,-16.507 h1
  text "400" at 12.47,-17.399 h1
  text "OFF" at 15.891,-17.399 h1
  text "OFF" at 18.258,-17.399 h1
  text "ON" at 20.717,-17.399 h1
  text "OFF" at 23.084,-17.399 h1
  text "ON" at 25.543,-17.399 h1
  text "400" at 12.47,-18.58 h1
  text "OFF" at 15.891,-18.58 h1
  text "OFF" at 18.258,-18.58 h1
  text "ON" at 20.717,-18.58 h1
  text "OFF" at 23.084,-18.58 h1
  text "OFF" at 25.543,-18.58 h1
  text "BREAK" at 48.891,-19.007 h1
  text "800" at 12.47,-19.761 h1
  text "OFF" at 15.891,-19.761 h1
  text "ON" at 18.258,-19.761 h1
  text "OFF" at 20.717,-19.761 h1
  text "ON" at 23.084,-19.761 h1
  text "OFF" at 25.543,-19.761 h1
  text "1600" at 12.47,-20.942 h1
  text "OFF" at 15.891,-20.942 h1
  text "ON" at 18.258,-20.942 h1
  text "OFF" at 20.717,-20.942 h1
  text "OFF" at 23.084,-20.942 h1
  text "ON" at 25.543,-20.942 h1
  text "B2" at 50.689,-21.507 h1
  text "3200" at 12.47,-22.124 h1
  text "OFF" at 15.891,-22.124 h1
  text "ON" at 18.258,-22.124 h1
  text "OFF" at 20.717,-22.124 h1
  text "OFF" at 23.084,-22.124 h1
  text "OFF" at 25.543,-22.124 h1
  text "6400" at 12.47,-23.305 h1
  text "OFF" at 15.891,-23.305 h1
  text "OFF" at 18.258,-23.305 h1
  text "OFF" at 20.717,-23.305 h1
  text "ON" at 23.084,-23.305 h1
  text "OFF" at 25.543,-23.305 h1
  text "B1" at 50.689,-24.007 h1
  text "12800" at 12.47,-24.486 h1
  text "ON" at 15.891,-24.486 h1
  text "OFF" at 18.258,-24.486 h1
  text "OFF" at 20.717,-24.486 h1
  text "OFF" at 23.084,-24.486 h1
  text "OFF" at 25.543,-24.486 h1
  text "25600" at 12.47,-25.667 h1
  text "OFF" at 15.891,-25.667 h1
  text "OFF" at 18.258,-25.667 h1
  text "OFF" at 20.717,-25.667 h1
  text "OFF" at 23.084,-25.667 h1
  text "OFF" at 25.543,-25.667 h1
  text "A2" at 50.478,-26.507 h1
  text "51200" at 12.47,-26.848 h1
  text "OFF" at 15.891,-26.848 h1
  text "OFF" at 18.258,-26.848 h1
  text "OFF" at 20.717,-26.848 h1
  text "OFF" at 23.084,-26.848 h1
  text "ON" at 25.543,-26.848 h1
  text "A1" at 50.689,-29.007 h1
  text "SW6" at 33.667,-31.764 h1
  text "SW7" at 35.953,-31.764 h1
  text "SW8" at 38.239,-31.764 h1
  text "PUL" at 6.637,-32.2 h0.8
  text "OFF" at 33.734,-32.907 h1
  text "ON" at 35.893,-32.907 h1
  text "ON" at 38.306,-32.907 h1
  text "Smart tune Dynamic Decay" at 40.831,-32.995 h1
  text "DIR" at 6.637,-33.45 h0.8
  text "OFF" at 33.734,-33.949 h1
  text "ON" at 35.893,-33.949 h1
  text "OFF" at 38.306,-33.949 h1
  text "Smart tune Ripple Control" at 40.831,-34.006 h1
  text "EN" at 6.637,-34.7 h0.8
  text "ON" at 33.734,-34.99 h1
  text "OFF" at 35.893,-34.99 h1
  text "ON" at 38.306,-34.99 h1
  text "Mixed decay: 30% fast" at 40.831,-35.154 h1
  text "GND" at 6.754,-35.918 h0.8
  text "ON" at 33.734,-36.031 h1
  text "OFF" at 35.893,-36.031 h1
  text "OFF" at 38.306,-36.031 h1
  text "Slow | Mixed decay 30%" at 40.831,-36.17 h1
  text "OFF" at 33.734,-37.073 h1
  text "OFF" at 35.893,-37.073 h1
  text "ON" at 38.306,-37.073 h1
  text "Mixed decay: 60% fast" at 40.831,-37.186 h1
  text "OFF" at 33.734,-38.114 h1
  text "OFF" at 35.893,-38.114 h1
  text "OFF" at 38.306,-38.114 h1
  text "Slow decay" at 40.831,-38.329 h1
Bottom Solder:
  rectangle: 21.209,-38.862 36.576,-1.778